# EAGLE board Environment-ArduinoNano-V10.1-Middle-KeyChain (EAGLE 9.5.2)
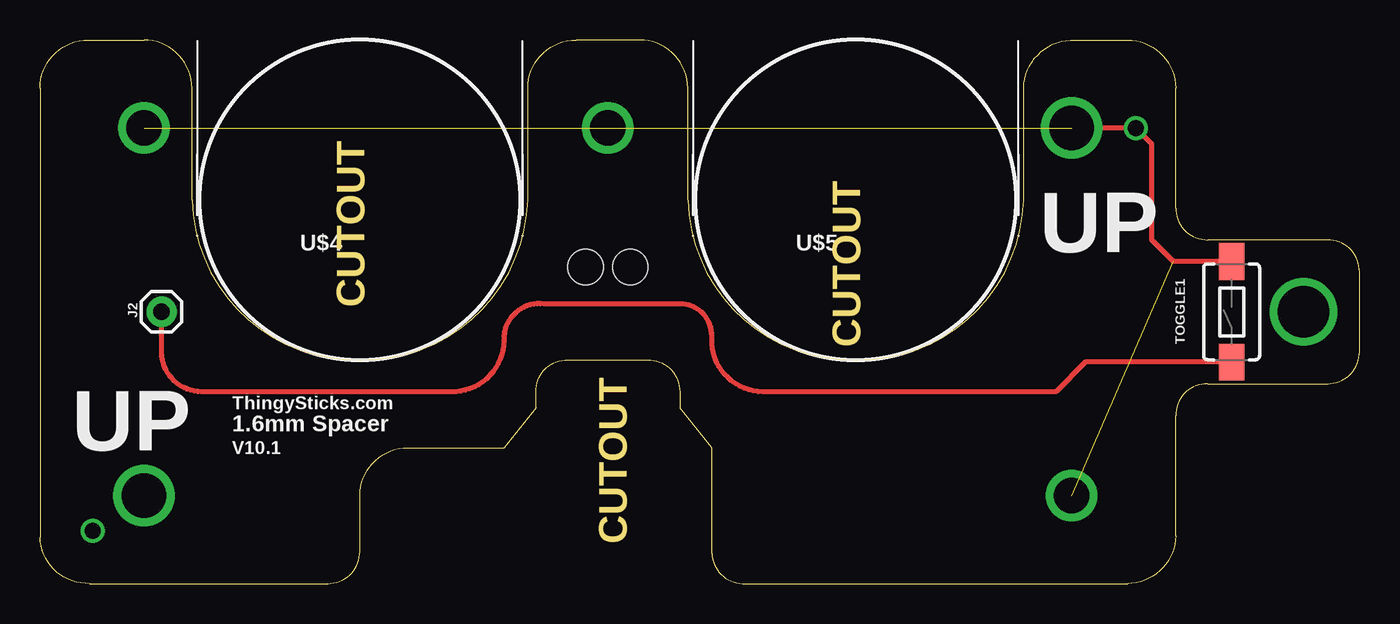
[diagram p0: board, top side]

Size 82.5 x 34 mm. Coordinates in mm from the lower left corner, seen from the top.
Outline: 0,31 0,2.9 arc90 3.1,0 18,0 arc90 20,2 20,5.5 arc-90 23,8.5 29,8.5 31,11 31,12 arc-90 33,14 38,14 arc-90 40,12 40,11 42,8.5 42,1.9 arc90 44.1,0 68,0 arc90 71,3 71,10.5 arc-90 73,12.5 80.5,12.5 arc90 82.5,14.5 82.5,19.5 arc90 80.5,21.5 73,21.5 arc-90 71,23.5 71,31 arc90 68,34 64.7,34 arc90 61.5,31 61.5,24 arc-90 51,14 arc-90 40.5,24 40.5,31 arc90 37.5,34 33.5,34 arc90 30.5,31 30.5,24 arc-90 20,14 arc-90 9.5,24 9.5,31 arc90 6.5,34 3,34 arc90 0,31
Copper layers (1*16): Top 0.035mm / dielectric 1.5mm / Bottom 0.035mm
Design rules "dirt_cheap_dirty_boards.v1.1": minimum track width 6mil, minimum drill 12mil, track to track 6mil, track to pad 6mil, pad to pad 6mil, via to via 6mil, smd to smd 0mil, copper to edge 10mil, drill to drill 10mil, minimum pad ring 10mil, minimum via ring 6mil, stop-mask expansion 2mil, vias tented up to drill 25mil, thermal gap 10mil
Holes 2.2 mm at 34.1,19.8 36.9,19.8
tKeepout: area 0,0 to 71,34; area 21.5,1.5 to 28.5,7.5
tRestrict: area 10,16 to 30,36; area 41,14 to 61,34; area 0,0 to 71,34

## Footprints (pad centres in the part's own frame; a part is rotated, then mirrored left to right if it is on the bottom)
1X01 = drill 1.016 pad 1.88: 1 0,0
TACTILE_SWITCH_SMD_6.0X3.5MM = smd 2.3 x 1.6: 1 -3.15,0; 2 3.15,0

## Placement (x,y rotation side)
J2  [1X01]  7.6,17 0 top
TOGGLE1  MOMENTARY-SWITCH-SPST-SMD-6.0X3.5MM  [TACTILE_SWITCH_SMD_6.0X3.5MM]  74.5,17 90 top
U$1  PERSONAL_ENVIRONMENT_SENSORBOTTOM  [PERSONAL_ENVIRONMENT_SENSOR_BOTTOM]  -2.8,41.5 0 top  (outside the outline)
U$2  PERSONAL_ENVIRONMENT_SENSORTOP  [PERSONAL_ENVIRONMENT_SENSOR_TOP]  -3,78.8 0 top  (outside the outline)
U$4  CR2032-SPLIT-PCB-MIDDLE  [CR2032-SMD-MIDDLE-OUTLINE]  20,24 0 top
U$5  CR2032-SPLIT-PCB-MIDDLE  [CR2032-SMD-MIDDLE-OUTLINE]  51,24 0 top

## Library data of the parts
J2 = SparkFun-Connectors
TOGGLE1 = ThingySticks; PROD_ID: SWCH-00815; SF_SKU: COM-08229
U$1 U$2 U$4 U$5 = ThingySticks

## Nets
A0: J2.1 TOGGLE1.1
GND: TOGGLE1.2

## Tracks (layer width: path | path; a pad name or v marks a point on that pad's centre or on a via)
3.3V1  (via drill 1)
  other vias: 3.3,3.3
A0
  Top 0.305: TOGGLE1.1 65.35,13.85 63.5,12 45.5,12 arc-90 42,15 42,15.5 arc90 40,17.5 31.5,17.5 arc90 29,15.5 arc-90 26,12 10.1,12 arc-90 7.6,14.5 7.6,16.8 arc90 7.5,17 J2.1
GND  (via drill 1, 2.2, 2.8)  (3 unrouted)
  Top 0.305: TOGGLE1.2 70.85,20.15 69.5,21.5 69.5,27.5 v68.5,28.5 v64.5,28.5
  other vias: 6.5,28.5 64.5,5.5 35.5,28.5
N$1  (via drill 2.8)
  other vias: 6.5,5.5
N$42  (via drill 3.2)
  other vias: 79,17

## Text on the board
Dimension: CUTOUT | CUTOUT | CUTOUT
tNames: UP | ThingySticks.com | 1.6mm Spacer | UP | V10.1
Document: Keychain Middle. / Bottom wall slightly smaller to allow for a cover to slide on using the grove | For Enclosure: / Hammon - 1551V2WH - / Plastic Enclosure, Small, ABS, 80 mm, 40 mm, 20 mm, IP30 / / Farnell: 2985869 | Cable exit / From under PCB to / Front, then up to top | Changes: / / Moved bottom outline down to match the top/bottom boards for easier assembly
Reference: 1.6mm PCB | Middle PCB
tDocu: NFC Pads